# Altium PCB M_Tas3.PcbDoc (part 2 of 2)
Units mm, origin at the board's own origin, x right, y up, seen from the top; angles counter-clockwise.
Board outline 100.84 x 81.79 mm, 2 copper layers (Top Layer, Bottom Layer); 78 components, 39 nets, 214 pads, 61 vias.
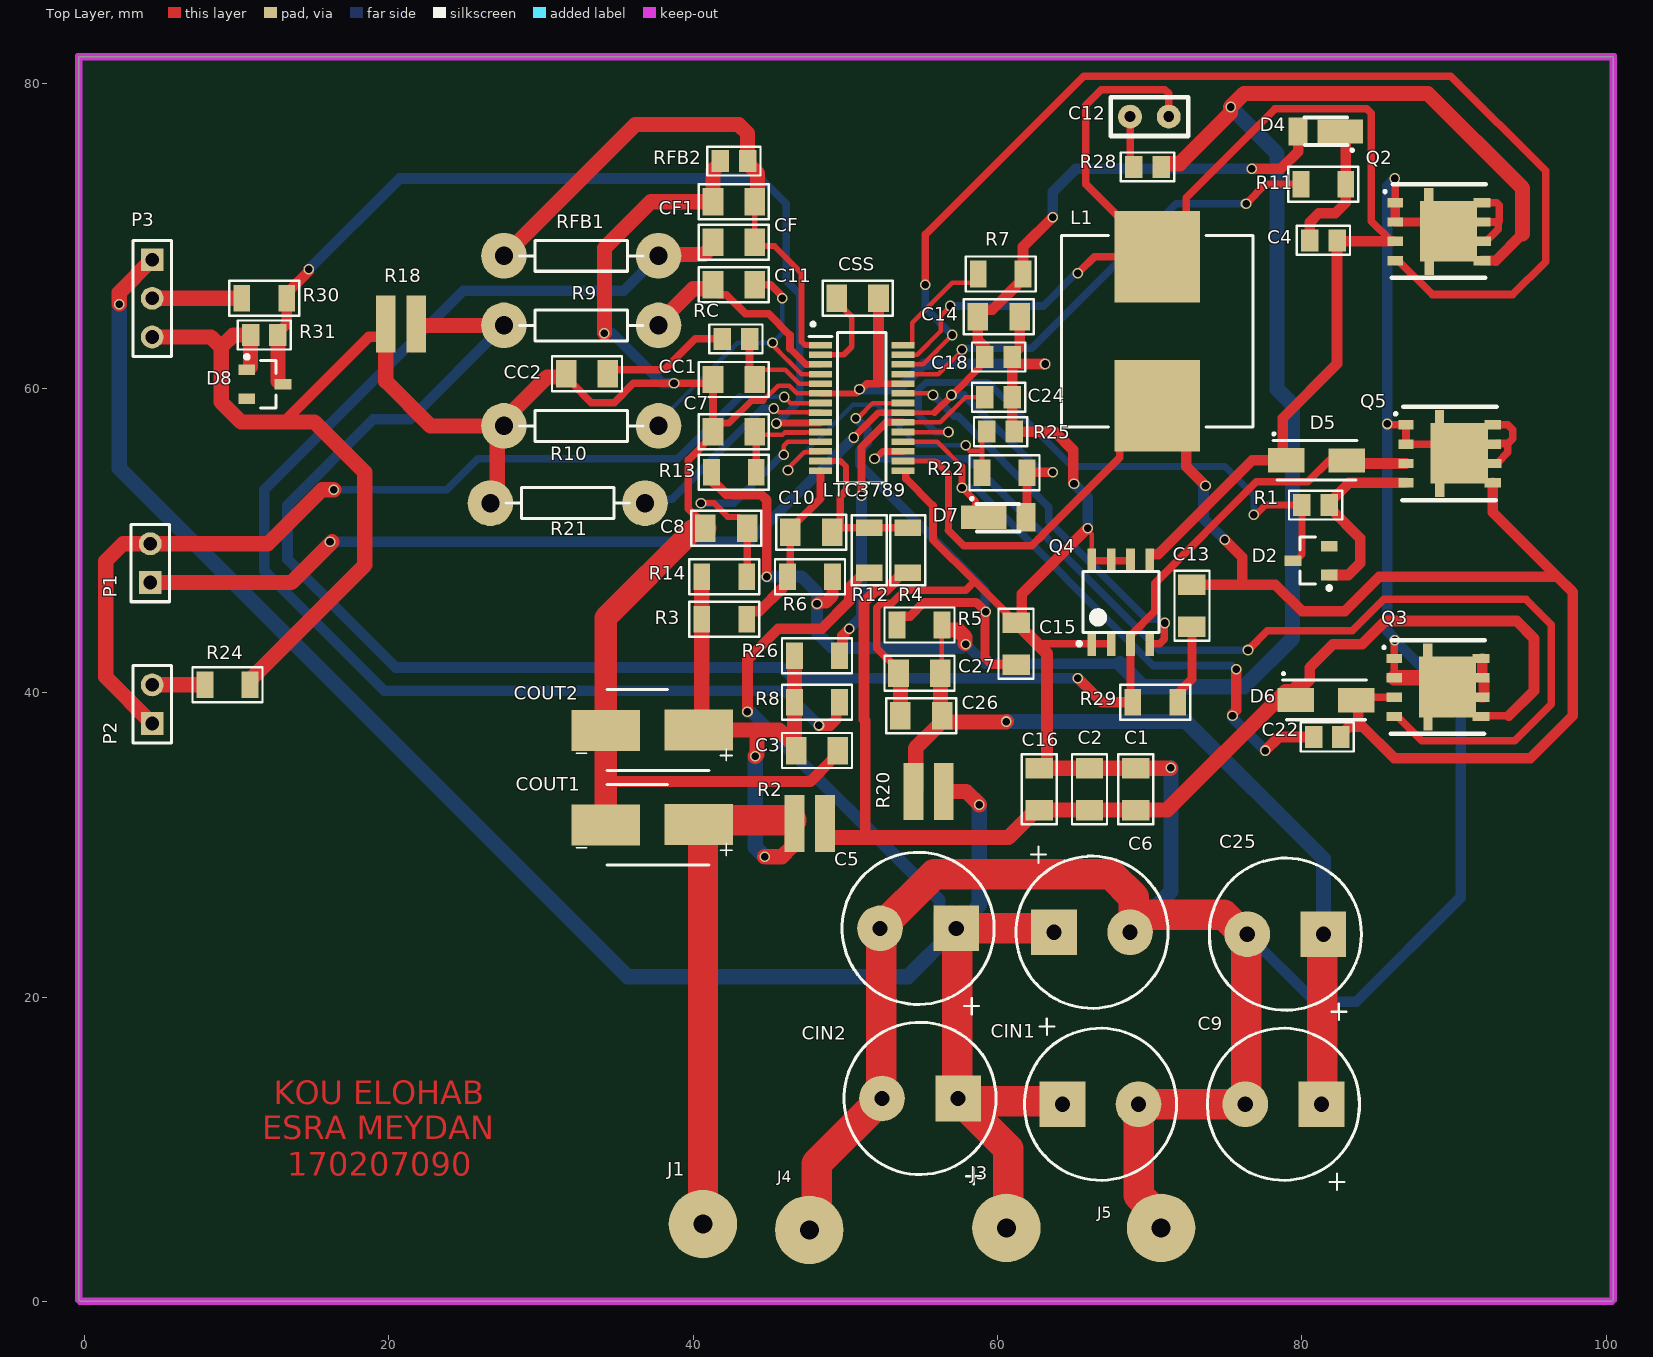
[diagram p0: Top Layer view]

## Via types
v1: diameter 0.7, hole 0.5, Top Layer to Bottom Layer, 61 vias

## Nets (pads, with @x,y where several pads share a name; then routed paths per layer and width w, separated by ;. In a path a pad name is that pad's centre, name@x,y a point inside that pad or via, vN(x,y) a via of type N, cw(c..) or ccw(c..) an arc to the next point about the centre after c; other vN are vias at no path point) (continued)
GND: (continued)
  Top Layer w0.7: 13.081,57.785 18.689,63.393 R18.2@19.396,63.393 ; 34.247,34.163 47.701,34.163 C3.2@49.109,35.571 ; CSS.2 52.175,60.474 52.197,60.452 ; R25.2@60.971,57.277 C24.2 C18.2@60.971,62.02 ; C18.2@60.971,62.204 61.446,62.679 C14.2 ; R25.2 63.754,57.15 64.96,55.944 v1@64.96,53.785 ; C18.2@61.396,61.595 v1@62.992,61.595 ; C15.2@61.595,44.978 61.595,46.482 v1(65.913,50.8) ; Q3.7 91.81,40.932 91.965,40.932 91.965,40.232 ; Q3.6 91.945,39.707 91.99,39.752 91.99,40.089 ; Q3.7@91.849,41.061 Q3.8@91.849,42.247
  Top Layer w0.8: C15.2 62.684,43.126 63.246,42.565 63.246,35.774 63.238,35.766 63.238,35.305 62.963,35.03 C16.1
  Top Layer w1: P3.3 8.309,63.373 8.981,62.702 ; R24.2@10.873,40.838 18.42,48.385 18.42,54.478 15.113,57.785 13.081,57.785 10.287,57.785 8.981,59.091 8.981,62.702 ; D8.1@10.911,61.414 R31.2 9.779,63.5 8.981,62.702 ; R18.2@19.796,63.793 19.796,60.468 22.733,57.531 R10.1 ; R21.1@27.114,52.895 R10.1@27.114,57.087 ; R10.1@27.559,57.911 30.383,60.735 CC2.1@31.42,60.735 ; v1(34.163,63.627) 34.163,69.215 37.211,72.263 CF1.1 41.297,74.305 41.772,74.78 RFB2.2 ; C5.2 C5.2@52.34,24.447 ; CIN2.2@52.34,13.399 CIN2.2 ; C26.2 C27.2@53.616,41.148 ; C16.1@62.963,35.03 C2.1 C1.1 v1@71.352,35.03 ; C9.2 C9.2@76.343,13.018 ; Q3.2 Q3.@88.96,40.977
  Top Layer w1.5: COUT1.2 34.247,34.163 COUT2.2 34.247,44.915 39.982,50.65 40.714,50.65 40.714,50.725 C8.1
  Top Layer w2: J4.1 48.103,5.177 48.103,9.034 CIN2.2 ; C5.2 55.833,28.067 67.437,28.067 68.961,26.543 C6.2@68.961,25.4 ; CIN2.2@52.34,13.399 C5.2@52.34,24.447 ; C6.2 69.85,25.4 74.866,25.4 76.136,24.13 C25.2 ; J5.1 70.739,5.502 69.262,6.979 CIN1.2 C9.2 ; C9.2@76.343,13.018 C25.2@76.343,24.066
  Bottom Layer w0.3: v1(86.106,43.434) v1@86.106,43.542
  Bottom Layer w0.7: v1(34.163,63.627) 34.671,63.627 37.973,60.325 v1(38.735,60.325) ; v1(50.927,59.944) 53.506,59.944 55.157,61.595 v1(63.119,61.595) ; v1(65.024,53.721) 65.913,52.832 v1(65.913,50.8) ; C25.2 80.852,19.685 83.566,19.685 90.424,26.543 90.424,39.116 v1(86.106,43.434) ; v1@86.106,43.542 85.598,44.05 85.598,73.279 v1(86.106,73.787)
  Bottom Layer w1: C6.2 71.389,26.939 v1(71.389,35.067)
INTVCC: C14.1 C18.1 D4.2 D7.2 LTC3789.21 P1.1 R7.1 R22.1 | length 106.6
  Top Layer w0.3: LTC3789.21 55.855,58.395 ; C14.1 C14.1@59.162,65.162 ; C18.1 C18.1@59.171,62.204 ; R7.1@61.273,66.79 R7.1@61.673,67.19 ; D7.2 D7.2@61.927,51.598
  Top Layer w0.45: v1(50.546,56.769) 52.172,58.395 LTC3789.21 ; 55.855,58.395 56.967,59.507 v1(56.967,59.557) ; v1@57.015,59.555 57.912,60.452 57.912,60.467 58.821,61.376 58.821,61.458 58.821,61.704 C18.1
  Top Layer w0.6: D7.2@61.927,51.598 R22.1 61.952,54.483 v1(63.627,54.483)
  Top Layer w0.7: C14.1 58.696,63.176 59.171,62.701 C18.1@59.171,62.204 ; C14.1@59.162,65.162 59.645,65.162 R7.1@61.273,66.79 ; R7.1@61.673,67.19 R7.1 61.673,69.293 v1(63.627,71.247) ; v1(76.708,74.422) 78.613,74.422 79.751,75.56 D4.2
  Top Layer w1: P1.1 13.589,47.244 v1@16.256,49.911
  Bottom Layer w0.5: v1(56.967,59.557) 57.791,59.557 62.865,54.483 v1(63.627,54.483)
  Bottom Layer w0.7: v1(16.129,49.911) 43.688,49.911 v1(50.546,56.769) ; v1(63.627,71.247) 63.627,72.898 65.151,74.422 v1(76.708,74.422)
NetC4_1: C4.1 D4.1 R11.2 | length 9.6
  Top Layer w0.3: D4.1 82.882,76.491 D4.1@82.691,76.682
  Top Layer w0.7: C4.1 80.507,70.898 81.11,71.501 82.187,71.501 82.882,72.196 R11.2 82.882,76.491 D4.1@82.882,76.872
NetC4_2: C4.2 C12.2 D5.1 L1.1 LTC3789.27 Q2.3 Q4.5 | length 99.2
  Top Layer w0.3: LTC3789.27 54.712,62.205 56.269,63.762 56.269,64.778 v1(56.896,65.405) ; Q4.5 70.139,48.807 Q4.5@70.139,49.1 ; L1.1@70.358,68.654 L1.1@70.358,68.854 ; L1.1 70.585,68.754 L1.1@72.517,70.686 ; D5.1@78.74,55.494 D5.1 ; C4.2 C4.2@82.369,69.661
  Top Layer w0.5: v1@65.405,67.691 66.368,68.654 L1.1 ; L1.1@70.358,68.854 65.786,73.426 65.786,78.613 66.802,79.629 70.993,79.629 71.247,79.375 C12.2 ; L1.1@72.39,70.686 72.39,72.517 78.232,78.359 84.27,78.359 84.563,78.066 84.563,70.982 85.829,69.716 86.077,69.716 Q2.3
  Top Layer w0.7: Q4.5@70.139,49.1 70.563,49.1 76.744,55.281 D5.1 ; D5.1@78.74,55.494 78.74,58.039 82.307,61.606 C4.2 ; C4.2@82.369,69.661 Q2.3@85.937,69.661
  Bottom Layer w0.5: v1(56.896,65.405) 62.992,65.405 v1@65.151,67.564
  other v1: 65.278,67.564
NetC7_2: C7.2 LTC3789.10 R13.1 | length 6.6
  Top Layer w0.3: C7.2 44.047,56.925 44.147,56.825 44.259,56.937 45.866,56.937 46.026,57.097 47.417,57.097 47.433,57.112 47.75,57.112 47.788,57.15 LTC3789.10@47.879,57.15 ; LTC3789.10@48.329,57.091 LTC3789.10
  Top Layer w0.5: R13.1 C7.2@44.147,56.825
NetC8_2: C8.2 LTC3789.11 R14.1 | length 17.1
  Top Layer w0.3: v1(40.513,52.451) v1@40.664,52.3 ; C8.2@43.014,51.55 43.539,51.025 C8.2 ; R14.1 R14.1@43.539,47.652 ; v1(45.946,55.634) 45.946,56.233 46.204,56.491 LTC3789.11
  Top Layer w0.4: v1(40.513,52.451) 41.367,52.451 42.268,51.55 C8.2@43.014,51.55
  Top Layer w0.5: R14.1@43.539,47.652 C8.2
  Bottom Layer w0.5: v1(40.513,52.451) 42.672,52.451 45.855,55.634 v1(45.946,55.634)
NetC10_1: C10.1 LTC3789.13 R4.1 R12.1 | length 11.2
  Top Layer w0.3: C10.1 49.41,50.829 C10.1@49.652,51.071
  Top Layer w0.4: LTC3789.13 49.681,55.221 50.038,54.864 50.038,53.273
  Top Layer w0.5: C10.1@49.41,50.829 49.652,50.829 R12.1 R4.1 ; C10.1@49.652,51.071 49.652,52.887 50.038,53.273
NetC10_2: C10.2 LTC3789.14 R3.1 R6.1 | length 12.1
  Top Layer w0.3: R6.1 R6.1@46.377,47.803 ; C10.2 C10.2@46.377,50.771
  Top Layer w0.5: R6.1@45.899,46.915 45.899,47.325 R6.1 ; R6.1@46.377,47.803 C10.2 ; C10.2@46.377,50.771 48.363,52.757 LTC3789.14
  Top Layer w0.7: R3.1 43.512,45.156 43.712,45.356 44.34,45.356 R6.1@45.899,46.915
NetC11_1: C11.1 LTC3789.3 R9.2 | length 14.5
  Top Layer w0.3: R9.2 R9.2@37.719,64.262 ; C11.1@41.268,66.548 41.297,66.577 C11.1
  Top Layer w0.4: 47.572,61.571 LTC3789.3
  Top Layer w0.45: 46.355,62.611 47.395,61.571 47.572,61.571
  Top Layer w0.5: C11.1@41.297,66.577 41.722,66.152 42.179,66.152 43.434,64.897 44.958,64.897 46.355,63.5 46.355,62.611
  Top Layer w1: R9.2@37.719,64.262 40.005,66.548 C11.1@41.268,66.548
NetC11_2: C11.2 LTC3789.4 R10.2 | length 19.3
  Top Layer w0.3: v1(45.212,62.992) 45.289,62.915 45.289,62.753 46.197,61.844 46.202,61.844 47.111,60.935 LTC3789.4
  Top Layer w0.5: C11.2 45.085,66.802 v1@45.847,66.04
  Bottom Layer w0.3: R10.2 37.719,57.785 42.926,62.992 v1(45.212,62.992) 45.847,63.627 v1(45.847,65.913)
NetC12_1: C12.1 R28.2 | length 3.4
  Top Layer w0.3: R28.2@68.707,74.792 R28.2
  Top Layer w0.5: R28.2@68.707,74.792 C12.1
NetC13_1: C13.1 R29.2 | length 5.4
  Top Layer w0.3: R29.2 72.009,39.546 R29.2@72.009,40.132
  Top Layer w0.6: R29.2@72.009,40.132 72.771,40.894 C13.1
NetC13_2: C13.2 C22.2 D6.2 L1.2 LTC3789.16 Q3.3 Q5.5 | length 105.9
  Top Layer w0.3: LTC3789.16 55.904,55.221 56.006,55.119 ; L1.2@68.788,57.157 L1.2 ; L1.2@72.39,56.949 L1.2@73.135,56.204
  Top Layer w0.45: 56.006,55.119 56.769,54.356 56.769,50.673
  Top Layer w0.5: 56.769,50.673 57.785,49.657 62.23,49.657 62.669,50.096 62.688,50.096 62.983,50.391 62.983,50.41 68.026,55.453 68.026,56.522 L1.2@68.661,57.157 ; D6.2 83.776,39.707 Q3.3
  Top Layer w0.7: L1.2 72.39,56.949 72.39,54.864 v1(73.66,53.594) ; C13.2 76.073,47.095 ; v1(74.93,50.038) 76.073,48.895 76.073,47.095 ; C22.2 82.561,37.234 83.095,37.767 83.995,37.767 ; D6.2@83.695,39.497 83.695,38.068 83.995,37.767 ; Q5.5 92.534,51.865 96.774,47.625 ; 76.073,47.095 78.254,47.095 80.01,45.339 82.804,45.339 85.09,47.625 96.774,47.625 ; 83.995,37.767 86.076,35.687 94.996,35.687 97.79,38.481 97.79,46.609 96.774,47.625
  Bottom Layer w0.7: v1@73.533,53.594 73.533,51.435 v1(74.93,50.038)
NetC15_1: C15.1 LTC3789.22 R5.1 | length 32.2
  Top Layer w0.3: v1@50.8,58.039 51.792,59.031 LTC3789.22
  Top Layer w0.6: R5.1 53.389,44.775 53.639,45.025 54.249,45.025 55.156,45.932 58.589,45.932 59.182,45.339 59.182,42.291 59.626,41.847 C15.1
  Bottom Layer w0.5: 51.435,56.388 51.435,57.277
  Bottom Layer w0.6: v1(50.673,58.039) 51.435,57.277 ; 51.435,56.388 50.927,55.88 50.927,54.991 59.182,46.736 59.182,45.409 59.195,45.396 59.195,45.319 v1@59.182,45.306
  other v1: 59.214,45.306
NetC22_1: C22.1 D7.1 LTC3789.18 | length 41.3
  Top Layer w0.3: LTC3789.18 56.031,56.491 57.658,54.864 ; D7.1@58.546,52.083 D7.1 ; v1(75.438,38.481) v1@75.438,38.589
  Top Layer w0.45: 57.658,54.864 v1(57.658,53.467) 58.546,52.579 D7.1@58.546,52.083
  Top Layer w0.7: v1@75.438,38.589 75.692,38.843 v1(75.692,41.529) ; v1(77.597,36.195) 78.486,37.084 C22.1
  Bottom Layer w0.3: v1@75.438,38.354 v1(75.438,38.481)
  Bottom Layer w0.5: v1(57.658,53.467) 57.696,53.429 58.585,53.429 70.231,41.783 75.384,41.783 75.638,41.529 v1(75.692,41.529)
  Bottom Layer w0.7: v1@75.438,38.354 v1(77.597,36.195)
NetC24_1: C24.1 LTC3789.20 R26.1 | length 23.7
  Top Layer w0.3: LTC3789.20 56.237,57.761 57.887,59.411 C24.1
  Top Layer w0.5: v1(51.054,52.959) 51.054,56.134 52.681,57.761 LTC3789.20
  Top Layer w0.7: R26.1@49.77,42.58 49.808,42.618 49.808,43.742 v1(50.262,44.196)
  Bottom Layer w0.3: v1@51.054,52.851 v1(51.054,52.959)
  Bottom Layer w0.7: v1(50.262,44.196) 51.054,44.988 v1(51.054,52.959)
NetCC1_2: CC1.2 LTC3789.5 RC.1 | length 7.3
  Top Layer w0.3: CC1.2 44.047,60.689 44.572,61.214 46.048,61.214 46.961,60.301 LTC3789.5
  Top Layer w0.5: CC1.2@43.699,60.927 RC.1
NetCC2_2: CC2.2 RC.2 | length 8.5
  Top Layer w0.5: CC2.2 34.649,61.214 38.1,61.214 40.132,63.246 RC.2
NetCF1_2: CF1.2 CF.2 LTC3789.1 RFB1.2 RFB2.1 | length 37.1
  Top Layer w0.381: CF1.2 CF.2 44.301,69.342 45.339,69.342 47.117,67.564 47.117,63.068 47.34,62.845 48.359,62.845 LTC3789.1
  Top Layer w1: RFB1.2 36.195,77.343 42.986,77.343 43.572,76.757 RFB2.1 43.572,74.78 44.22,74.132 44.22,72.436 CF1.2
NetCSS_1: CSS.1 LTC3789.2 | length 5.9
  Top Layer w0.381: LTC3789.2 49.886,62.205 50.419,62.738 50.419,64.694 49.425,65.688 CSS.1
NetD2_1: D2.1 Q5.4 R1.1 | length 12.7
  Top Layer w0.3: R1.1@81.799,52.174 R1.1 R1.1@81.799,52.474
  Top Layer w0.7: D2.1 83.034,47.728 83.82,48.514 83.82,50.153 R1.1@81.799,52.174 ; R1.1@81.799,52.474 83.111,53.786 Q5.4
NetD2_3: D2.3 LTC3789.19 R1.2 | length 41.1
  Top Layer w0.3: LTC3789.19 v1(56.769,57.125) ; D2.3 D2.3@79.608,48.678
  Top Layer w0.45: v1(76.835,51.689) 76.883,51.737 77.01,51.737 77.597,52.324 R1.2 79.999,49.069 D2.3@79.608,48.678
  Bottom Layer w0.45: v1(56.769,57.125) 55.905,57.125 54.797,58.233 54.797,59.906 55.283,60.392 59.369,60.392 64.897,54.864 74.93,54.864 76.835,52.959 v1(76.835,51.689)
NetD5_2: D5.2 Q4.3 Q5.3 R9.1 R18.1 R29.1 | length 116.4
  Top Layer w0.3: R18.1 R18.1@21.895,64.135 ; R29.1@68.734,39.844 68.883,39.695 R29.1 ; Q4.3 Q4.3@68.734,43.737 ; D5.2@81.799,55.256 D5.2 D5.2@83.133,55.056
  Top Layer w0.5: R29.1@68.734,39.844 Q4.3 ; Q4.3@68.734,43.737 70.336,45.339 70.336,47.174 77.011,53.848 80.391,53.848 D5.2@81.799,55.256
  Top Layer w0.7: v1(65.278,40.956) 66.864,39.37 R29.1 ; D5.2@83.133,55.056 Q5.3
  Top Layer w1: R18.1@21.895,64.135 R9.1
  Bottom Layer w0.7: R9.1 21.395,57.971 18.982,57.971 13.335,52.324 13.335,48.768 20.447,41.656 45.799,41.656 46.499,40.956 v1(65.278,40.956)
NetD8_3: D8.3 LTC3789.9 R30.2 R31.1 | length 61.5
  Top Layer w0.3: D8.3@12.711,60.464 12.911,60.264 D8.3 ; R31.1 R31.1@12.711,63.65 ; R30.2 R30.2@13.286,66.238 ; v1@14.732,67.684 v1(14.732,67.818) ; v1(45.466,57.691) v1@45.501,57.726 ; LTC3789.9@48.328,57.726 LTC3789.9
  Top Layer w0.45: v1@45.501,57.726 LTC3789.9@48.328,57.726
  Top Layer w0.7: R31.1@12.711,63.65 13.286,64.225 R30.2 ; R30.2@13.286,66.238 v1@14.732,67.684
  Top Layer w1: D8.3@12.711,60.464 R31.1
  Bottom Layer w0.3: v1(45.466,57.691) 45.574,57.799 v1@45.607,57.799 ; 46.99,59.182 46.99,59.214
  Bottom Layer w0.5: 44.447,73.79 46.101,72.136 46.101,67.056 46.99,66.167 46.99,59.214 ; v1@45.607,57.799 46.99,59.182
  Bottom Layer w0.7: v1(14.732,67.818) 20.704,73.79 44.447,73.79
NetLTC3789_7: LTC3789.7 P1.2 P2.1 | length 63.5
  Top Layer w0.3: v1@45.987,59.423 46.379,59.031 LTC3789.7
  Top Layer w0.45: v1@45.987,59.423 v1(45.987,59.425)
  Top Layer w1: P2.1 1.397,41.021 1.397,48.641 2.54,49.784 P1.2 12.065,49.784 15.621,53.34 v1(16.383,53.34)
  Bottom Layer w0.3: 43.053,59.436 45.974,59.436 45.985,59.425 v1(45.987,59.425)
  Bottom Layer w0.5: v1(16.383,53.34) 23.803,53.34 25.835,55.372 38.989,55.372 43.053,59.436
NetLTC3789_8: LTC3789.8 R21.2 | length 14.2
  Top Layer w0.3: v1@45.36,58.674 45.614,58.42 LTC3789.8@47.665,58.42
  Top Layer w0.45: v1(45.293,58.674) v1@45.36,58.674 ; LTC3789.8@47.665,58.42 47.683,58.402 48.356,58.402 LTC3789.8
  Bottom Layer w0.3: R21.2 R21.2@37.08,52.701
  Bottom Layer w0.5: R21.2@37.08,52.701 38.604,52.701 44.577,58.674 v1(45.293,58.674)
NetLTC3789_12: LTC3789.12 R22.2 R25.1 | length 21.3
  Top Layer w0.3: v1@46.164,54.673 47.278,55.787 48.296,55.787 LTC3789.12 ; v1@57.912,56.134 58.166,55.88 58.977,55.88 ; R22.2 58.977,55.88 ; R25.1 58.977,56.829 58.977,55.88
  Bottom Layer w0.3: v1(46.228,54.61) 46.228,54.66 50.496,58.928 52.07,58.928 52.196,58.802 54.737,56.261 v1(57.912,56.261)
NetLTC3789_17: LTC3789.17 Q3.4 | length 71.1
  Top Layer w0.381: Q3.4 86.18,38.322 Q3.4@86.392,38.322 ; 94.742,46.101 94.742,46.132
  Top Layer w0.45: v1(51.908,55.376) 51.947,55.376 52.426,55.855 LTC3789.17
  Top Layer w0.5: v1(76.454,42.799) 77.724,44.069 83.312,44.069 85.375,46.132 94.742,46.132 ; Q3.4@86.392,38.322 87.884,36.83 93.98,36.83 96.393,39.243 96.393,44.45 94.742,46.101
  Bottom Layer w0.5: v1(51.908,55.376) 51.912,55.372 58.039,55.372 70.612,42.799 v1(76.454,42.799)
NetLTC3789_23: LTC3789.23 Q4.4 | length 26.2
  Top Layer w0.3: LTC3789.23 55.651,59.665 v1(55.753,59.563)
  Top Layer w0.5: Q4.4 70.654,43.222 70.955,43.523 70.955,44.485 70.993,44.523 v1(70.993,44.577)
  Bottom Layer w0.3: v1@70.885,44.577 v1(70.993,44.577)
  Bottom Layer w0.5: v1(55.753,59.563) 57.15,58.166 57.404,58.166 63.373,52.197 63.373,51.258 69.8,44.831 70.631,44.831 v1@70.885,44.577
NetLTC3789_25: LTC3789.25 R11.1 | length 31.3
  Top Layer w0.3: LTC3789.25 56.109,60.935 57.658,62.484 v1(57.658,62.549)
  Top Layer w0.5: v1(76.327,72.136) 77.597,73.406 R11.1
  Bottom Layer w0.5: v1(57.658,62.549) 57.696,62.587 57.838,62.587 57.888,62.638 62.257,62.638 71.755,72.136 v1(76.327,72.136)
NetLTC3789_26: LTC3789.26 Q2.4 | length 76.8
  Top Layer w0.3: LTC3789.26 53.8,61.583 55.106,61.583 v1(57.023,63.5) ; Q2.4 86.132,68.352 86.106,68.326 Q2.4@86.392,68.326
  Top Layer w0.5: v1(55.245,66.802) 55.245,70.104 65.659,80.518 89.789,80.518 96.012,74.295 96.012,68.326 93.853,66.167 88.551,66.167 Q2.4@86.392,68.326
  Bottom Layer w0.5: v1(55.245,66.802) 55.245,65.278 v1(57.023,63.5)
NetLTC3789_28: LTC3789.28 R7.2 | length 7.3
  Top Layer w0.3: LTC3789.28 54.333,62.841 54.4,62.909 54.4,64.306 57.023,66.929 58.462,66.929 R7.2@58.523,66.99
NetP2_2: P2.2 R24.1 | length 3.5
  Top Layer w1: P2.2 R24.1
NetP3_2: P3.2 R30.1 | length 5.9
  Top Layer w1: P3.2 R30.1
VIN: C9.1 C25.1 C26.1 C27.1 Q2.5 R5.2 R6.2 R13.2 R20.2 R28.1 | length 182.9
  Top Layer w0.3: R13.2@41.197,54.158 R13.2 ; C26.1@56.239,38.608 C26.1 C26.1@56.388,38.459 ; C27.1 56.339,41.375 R5.2@56.339,44.069 ; R5.2@56.339,44.125 R5.2 ; v1@57.859,43.233 v1(57.912,43.18)
  Top Layer w0.65: R13.2@41.324,53.777 41.428,53.777 42.176,53.029 44.45,53.029 44.831,52.648 v1(44.831,47.625) ; Q2.5 92.726,68.391
  Top Layer w0.7: 92.726,68.391 94.488,70.153
  Top Layer w0.8: v1(48.133,45.847) 48.21,45.924 48.718,45.924 49.149,46.355 R6.2
  Top Layer w1: R20.2 54.617,33.65 54.617,36.35 56.191,37.924 56.191,38.262 C26.1@56.388,38.459 ; C26.1@56.239,38.608 C27.1 ; R5.2@56.339,44.125 57.392,44.125 57.859,43.658 v1@57.859,43.233 ; C26.1@56.541,38.081 60.56,38.081 v1(60.579,38.1) ; R28.1 70.75,74.682 70.825,74.757 71.175,74.757 71.963,74.757 75.311,78.105 v1(75.311,78.486) 76.2,79.375 88.265,79.375 94.488,73.152 94.488,70.153 ; C9.1 C9.1@81.343,13.018 ; C25.1@81.343,24.066 C25.1
  Top Layer w2: C9.1@81.343,13.018 C25.1@81.343,24.066
  Bottom Layer w0.7: v1(57.912,43.18) 59.182,41.91 68.033,41.91
  Bottom Layer w0.8: v1(44.831,47.625) 47.117,47.625 48.133,46.609 v1(48.133,45.847) 48.133,43.942 49.149,42.926 57.658,42.926 v1(57.912,43.18)
  Bottom Layer w1: v1(60.579,38.1) 72.39,38.1 81.407,29.083 C25.1 ; 68.033,41.91 69.557,40.386 76.2,40.386 79.375,43.561 79.375,58.928 78.359,59.944 78.359,75.438 v1(75.311,78.486)
VIN+: C5.1 C6.1 CIN1.1 CIN2.1 J3.1 P3.1 R12.2 R20.1 | length 167
  Top Layer w0.3: R12.2@51.404,47.829 51.454,47.879 R12.2
  Top Layer w0.7: v1(43.561,38.735) 43.561,42.164 45.593,44.196 48.44,44.196 50.262,46.018 50.262,46.327 50.303,46.368 50.303,46.945 51.037,47.679 51.254,47.679 R12.2@51.404,47.829
  Top Layer w1: v1(2.286,65.532) 2.286,66.294 P3.1 ; R20.1 57.94,33.5 v1(58.801,32.639) ; C5.1 C5.1@57.34,24.447 ; CIN2.1@57.34,13.399 CIN2.1 CIN2.1@57.594,13.144 ; CIN1.1@64.072,13.144 CIN1.1
  Top Layer w2: C5.1 C6.1@63.881,24.511 ; CIN2.1@57.34,13.399 C5.1@57.34,24.447 ; J3.1 60.706,4.953 60.706,10.033 57.594,13.144 CIN1.1@64.072,13.144
  Bottom Layer w0.5: C5.1@56.177,25.611 56.261,25.527 C5.1
  Bottom Layer w0.7: C5.1@57.023,24.257 57.023,24.511 C5.1
  Bottom Layer w0.8: v1(43.561,38.735) 43.815,38.735 56.177,26.373 C5.1@56.177,25.611 ; C5.1@56.261,25.527 C5.1@57.023,25.527
  Bottom Layer w1: v1(2.286,65.532) 2.286,54.737 35.687,21.336 54.102,21.336 C5.1@57.023,24.257 ; C5.1@57.277,25.527 C5.1 58.801,26.035 v1(58.801,32.639)
VOS+: CF.1 R8.1 RFB1.1 | length 84.9
  Top Layer w0.7: v1(48.26,37.846) 48.998,37.846 49.408,38.256 49.408,39.17 R8.1
  Top Layer w1: RFB1.1 37.805,68.793 40.719,68.793 41.297,69.371 CF.1
  Bottom Layer w0.7: RFB1.1 35.433,66.421 24.892,66.421 11.811,53.34 11.811,48.006 19.685,40.132 45.974,40.132 v1(48.26,37.846)
VOUT: C3.1 COUT1.1 COUT2.1 J1.1 R2.1 R3.2 R8.2 R14.2 R26.2 | length 67.9
  Top Layer w1: COUT1.1 COUT1.1@40.64,31.03 ; R14.2 R3.2 40.562,37.761 40.777,37.546 44.196,37.546 ; v1(44.069,35.814) 44.196,35.941 44.196,37.546 ; v1(44.704,29.21) 45.812,29.21 46.507,29.905 46.507,31.247 R2.1 ; C3.1@46.583,35.984 46.758,36.159 C3.1 46.758,36.42 C3.1@46.658,36.52 ; R26.2 R8.2 C3.1@46.658,36.52 ; 44.196,37.546 45.632,37.546 C3.1@46.658,36.52
  Top Layer w2: COUT1.1 40.647,31.623 R2.1@46.431,31.623 ; J1.1 COUT1.1@40.64,31.03
  Bottom Layer w1: v1(44.069,35.814) 44.069,29.845 v1(44.704,29.21)
VOUT1: C1.2 C2.2 C16.2 D6.1 Q3.5 R2.2 R4.2 | length 80.9
  Top Layer w0.3: C16.2@62.513,32.28 C16.2
  Top Layer w0.5: Q3.5@91.965,38.481 93.599,38.481
  Top Layer w0.7: 51.308,30.48 51.308,38.16 51.216,38.252 51.216,45.932 52.009,46.725 52.687,46.725 53.082,47.12 53.082,47.184 53.777,47.879 R4.2 ; 79.715,40.357 80.059,40.357 80.509,40.807 80.509,41.647 82.042,43.18 83.947,43.18 85.471,44.704 94.107,44.704 95.25,43.561 95.25,40.132 93.599,38.481
  Top Layer w1: R2.2 48.657,30.63 48.807,30.48 51.308,30.48 60.713,30.48 C16.2@62.513,32.28 ; C16.2 C2.2 C1.2 71.142,32.28 78.919,40.057 79.415,40.057 79.715,40.357
pads on no net: D2.2 D8.2 Q2.@88.332,72.626 Q2.@88.357,68.001 Q3.@88.29,38.047 Q3.@88.265,42.672 Q5.@89.034,58.021 Q5.@89.059,53.396

## Keep-outs
Keep-Out Layer:
  lines w0.254: -0.508,0.127 ccw(c-0.381,0.127) -0.471,0.037 -0.47,0.037 ; -0.508,0.127 ccw(c-0.381,0.127) -0.47,0.037 ; -0.508,0.127 -0.508,81.788 ; -0.508,81.788 cw(c-0.381,81.788) -0.381,81.915 ; -0.508,81.788 cw(c-0.381,81.788) -0.381,81.915 ; -0.47,0.037 -0.344,-0.089 ; -0.381,81.915 100.457,81.915 ; -0.344,-0.089 ccw(c-0.254,0) -0.254,-0.127 ; -0.344,-0.089 -0.344,-0.09 ccw(c-0.254,0) -0.254,-0.127 ; -0.254,-0.127 100.33,-0.127 ; 100.33,-0.127 ccw(c100.33,0) 100.42,-0.09 100.42,-0.089 ; 100.33,-0.127 ccw(c100.33,0) 100.42,-0.089 ; 100.42,-0.089 100.546,0.037 ; 100.457,81.915 cw(c100.457,81.788) 100.584,81.788 ; 100.457,81.915 cw(c100.457,81.788) 100.584,81.788 ; 100.546,0.037 ccw(c100.457,0.127) 100.584,0.127 ; 100.546,0.037 100.547,0.037 ccw(c100.457,0.127) 100.584,0.127 ; 100.584,0.127 100.584,81.788 ; -0.254,0.18 -0.201,0.127 100.277,0.127 100.33,0.18 100.33,81.661 -0.254,81.661 -0.254,0.18

## Other copper
Top Layer:
  text "KOU ELOHAB" at 12.446,12.954 h1.52
  text "ESRA MEYDAN" at 11.684,10.668 h1.52
  text "170207090" at 13.335,8.255 h1.52

## Silkscreen, mask and mechanical layers (free items; w line width, h text height)
Mechanical 1:
  lines w0.1: -0.381,0.127 -0.381,81.788 100.457,81.788 100.457,76.454 100.457,0.127 100.33,0 0,0 -0.254,0 -0.381,0.127